# EAGLE board Hardware_Comp_V1.2 (EAGLE 9.5.2)

Size 160 x 100 mm. Coordinates in mm from the lower left corner, seen from the top.
Outline: 0,0 160,0 160,100 0,100 0,0
Copper layers (1*16): Top 0.035mm / dielectric 1.5mm / Bottom 0.035mm
Design rules "default": minimum track width 6mil, minimum drill 0.35mm, track to track 6mil, track to pad 6mil, pad to pad 6mil, via to via 6mil, smd to smd 6mil, copper to edge 40mil, drill to drill 6mil, minimum pad ring 10mil, minimum via ring 8mil, stop-mask expansion 4mil, vias tented up to drill 0mil, thermal gap 10mil

## Footprints (pad centres in the part's own frame; a part is rotated, then mirrored left to right if it is on the bottom)
1X01 = drill 1.016 pad 1.93 octagon: 1 0,0
C0603 = smd 1.1 x 1: 1 -0.85,0; 2 0.85,0
SO14 = smd 0.6 x 2.2: 1 -3.81,-2.6; 2 -2.54,-2.6; 3 -1.27,-2.6; 4 0,-2.6; 5 1.27,-2.6; 6 2.54,-2.6; 7 3.81,-2.6; 8 3.81,2.6; 9 2.54,2.6; 10 1.27,2.6; 11 0,2.6; 12 -1.27,2.6; 13 -2.54,2.6; 14 -3.81,2.6
R0603 = smd 1 x 1.1: 1 -0.85,0; 2 0.85,0
RM_8-L = smd 1.219 x 0.381: 1 -2.121,0.975; 2 -2.121,0.325; 3 -2.121,-0.325; 4 -2.121,-0.975; 5 2.121,-0.975; 6 2.121,-0.325; 7 2.121,0.325; 8 2.121,0.975

## Placement (x,y rotation side)
9V-  [1X01]  -31.75,-19.05 0 top  (outside the outline)
C1  0.1u  [C0603]  -31.75,-30.48 0 top  (outside the outline)
C2  0.1u  [C0603]  -31.75,-34.29 0 top  (outside the outline)
C3  0.1u  [C0603]  -31.75,-38.1 0 top  (outside the outline)
C4  0.1u  [C0603]  -31.75,-41.91 0 top  (outside the outline)
C5  10u  [C0603]  -31.75,-48.26 0 top  (outside the outline)
C6  10u  [C0603]  -31.75,-92.71 0 top  (outside the outline)
C7  0.1u  [C0603]  -31.75,-111.76 0 top  (outside the outline)
C8  0.1u  [C0603]  -31.75,-118.11 0 top  (outside the outline)
C9  0.1u  [C0603]  -31.75,-148.59 0 top  (outside the outline)
C10  1u  [C0603]  -31.75,-154.94 0 top  (outside the outline)
IC1  LMV324M  [SO14]  -19.05,3.81 0 top  (outside the outline)
IC2  LMV324M  [SO14]  -26.67,-140.97 0 top  (outside the outline)
JP1  [1X01]  -31.75,-3.81 0 top  (outside the outline)
JP2  [1X01]  -31.75,-8.89 0 top  (outside the outline)
JP3  [1X01]  -31.75,-13.97 0 top  (outside the outline)
R1  50  [R0603]  -31.75,-24.13 0 top  (outside the outline)
R2  37.4K  [R0603]  -31.75,-99.06 0 top  (outside the outline)
R3  50  [R0603]  -31.75,-105.41 0 top  (outside the outline)
R4  37.4K  [R0603]  -31.75,-124.46 0 top  (outside the outline)
R5  60.4k  [R0603]  -31.75,-130.81 0 top  (outside the outline)
U1  AD8422ARMZRM_8-L  [RM_8-L]  -30.48,30.48 0 top  (outside the outline)

## Library data of the parts
9V- C1-C10 JP1-JP3 R1-R5 = adafruit
IC1 IC2 = linear
U1 = AD8422ARMZ; BUILT_BY: EMA_UL_Team; MANUFACTURER_PART_NUMBER: AD8422ARMZ; VENDOR: Analog Devices Inc

## Nets
GND: C1.1 C2.1 C3.1 C4.1 C7.2 C8.2 C9.2 R3.1 U1.6
N$1: C5.2 U1.7
N$2: C5.1 C6.1 R2.2
N$3: C6.2 IC1.3 R3.2
N$4: IC1.1 IC1.2 R2.1
N$5: R1.2 U1.3
N$6: R1.1 U1.2
N$7: C10.1
N$8: R4.2
N$9: IC2.3 R5.1
N$10: IC2.1 IC2.2 R4.1 R5.2
N$11: C10.2
REC_ELEC: JP1.1 U1.4
REF: JP2.1 U1.1
V+: 9V-.1 C3.2 C4.2 C7.1 IC1.4 IC2.4 U1.8
V+1: C8.1
V+2: C9.1
V-: C1.2 C2.2 IC1.11 IC2.11 JP3.1 U1.5

## Tracks (layer width: path | path; a pad name or v marks a point on that pad's centre or on a via)
GND  (8 unrouted)
N$1  (1 unrouted)
N$2  (2 unrouted)
N$3  (2 unrouted)
N$4  (2 unrouted)
N$5  (1 unrouted)
N$6  (1 unrouted)
N$9  (1 unrouted)
N$10  (3 unrouted)
REC_ELEC  (1 unrouted)
REF  (1 unrouted)
V+  (6 unrouted)
V-  (5 unrouted)